# Altium PCB brushless_nosensor.PcbDoc
Units mil, origin at the board's own origin, x right, y up, seen from the top; angles counter-clockwise.
Board outline 1625.03 x 870.03 mil, 2 copper layers (Top Layer, Bottom Layer); 68 components, 60 nets, 252 pads, 75 vias.
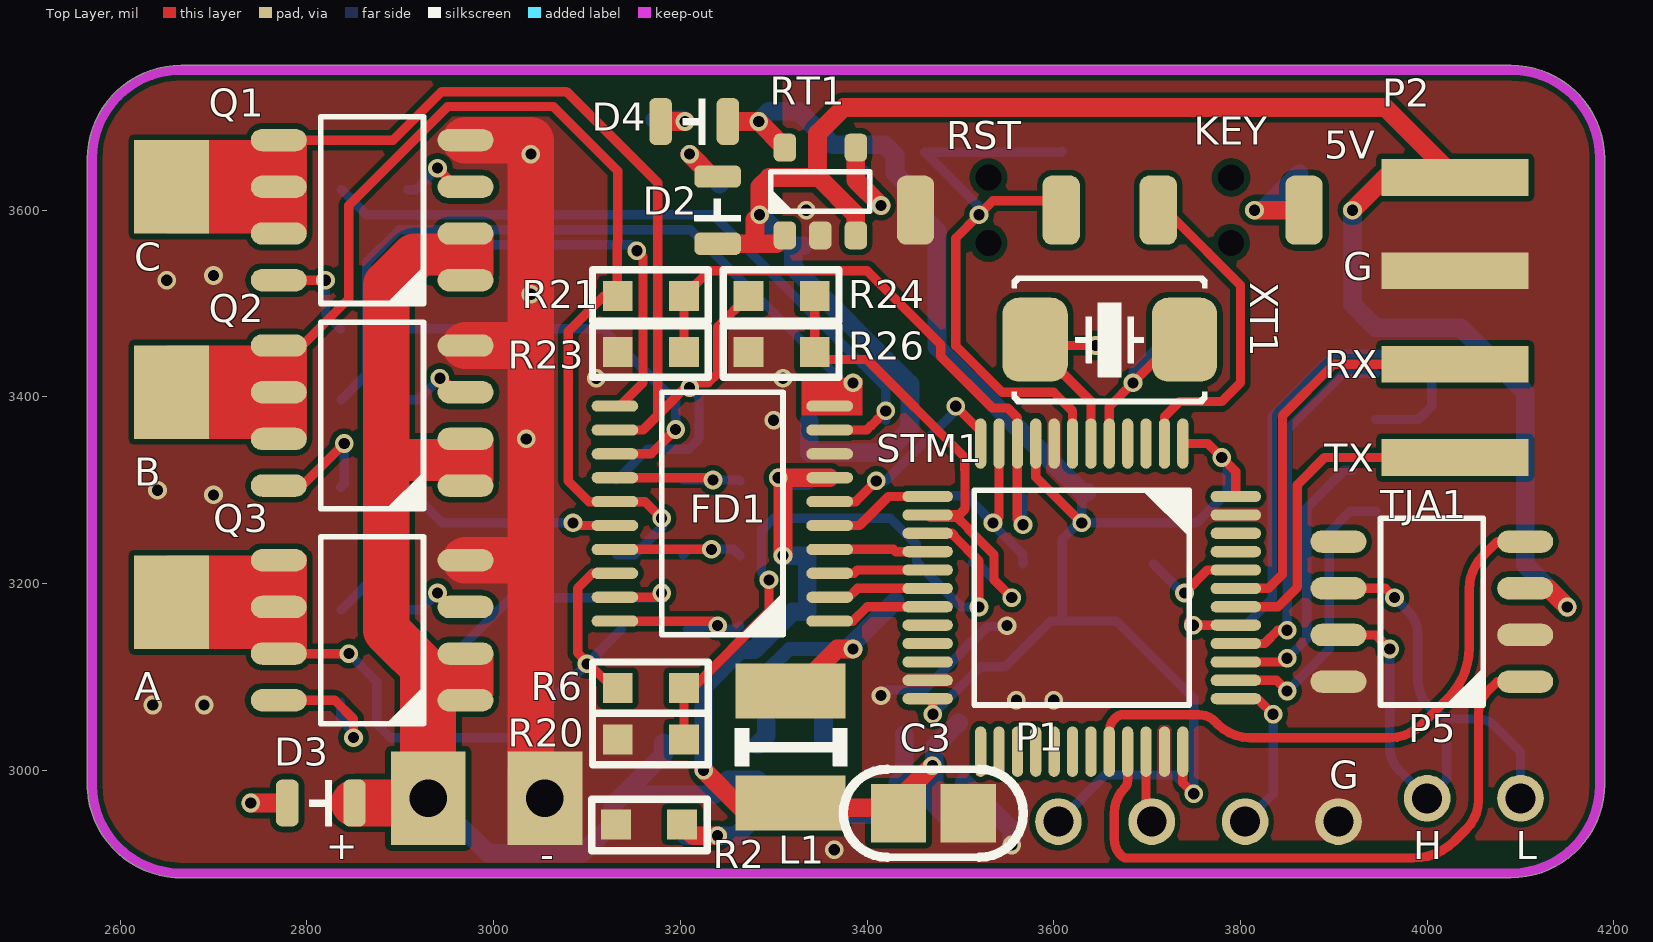
[diagram p0: Top Layer view]
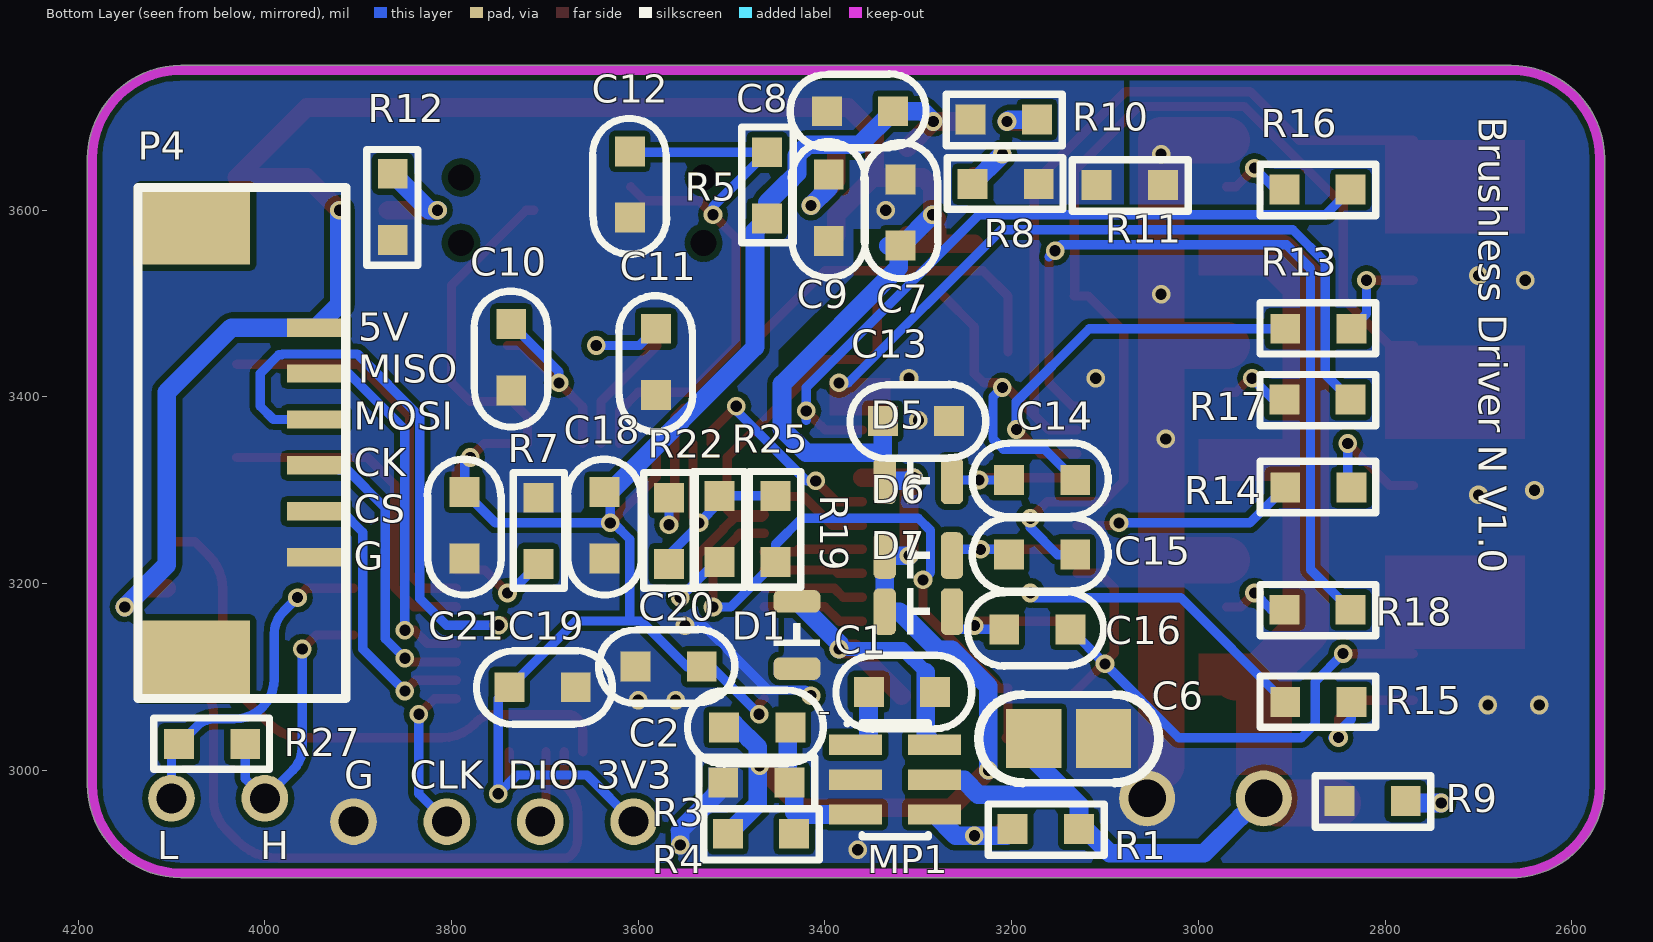
[diagram p1: Bottom Layer view, seen from below]
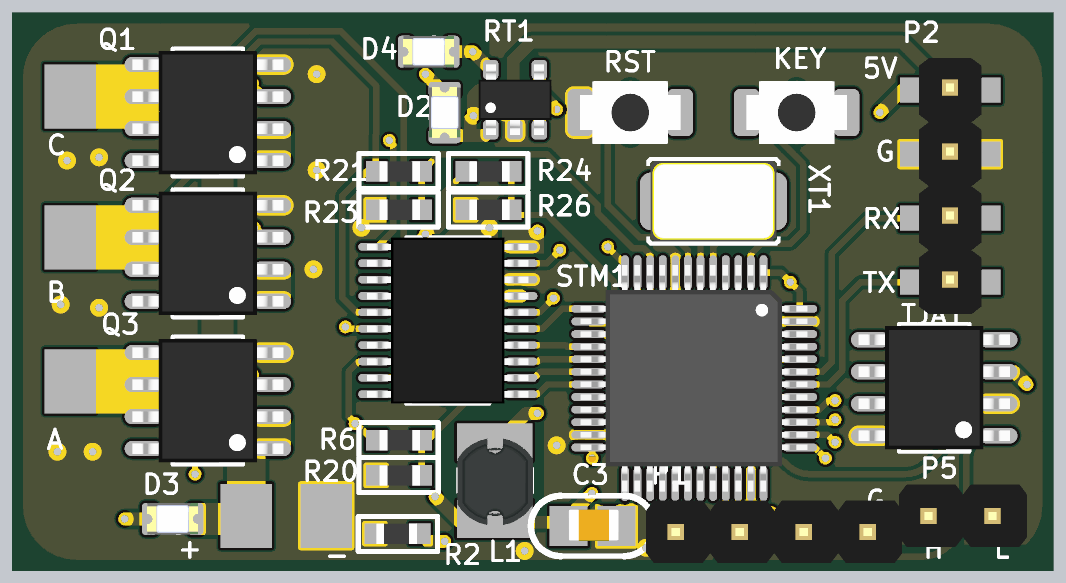
[diagram p2: 3D render of the assembled board from above, using the file's embedded part models]
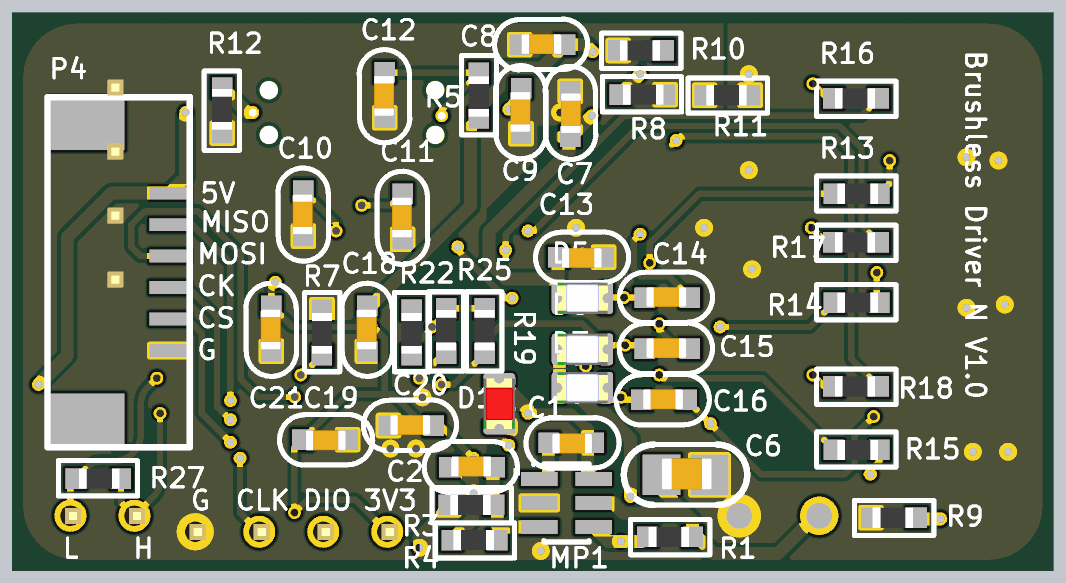
[diagram p3: 3D render of the assembled board from below, using the file's embedded part models]

## Layer stack, top to bottom
Top Solder: solder mask 0.4, Solder Resist, Dk 3.5
Top Layer: signal copper 1.4
Dielectric 1: dielectric 12.6, FR-4, Dk 4.8
Bottom Layer: signal copper 1.4
Bottom Solder: solder mask 0.4, Solder Resist, Dk 3.5

## Board outline
2658.58,2885.19 cw(c2665,2985) 2565.19,2978.58 cw(c2570,2980) 2564.99,2980 2564.99,3655 2564.98,3655 cw(c2665,3655) 2665,3755.01 4090,3755.01 4090,3755.02 cw(c4090,3655) 4190.02,3655 4190.02,2985 ccw(c4185,2985) 4190.02,2985.03 4190.02,2985 cw(c4090,2985) 4090,2884.99 2660,2884.99 cw(c2660,2890)

## Design rules (kind name [scope] priority, off if disabled: settings)
Clearance [All] p1: gap=6 ignorepadtopadclearanceinfootprint=FALSE
ComponentClearance [All] p1 off: gap=10 collisioncheckmode=3 verticalgap=10 showdistances=FALSE
PlaneConnect [All] p1: planeconnectstyle=Direct reliefexpansion=20 reliefentries=4 reliefconductorwidth=10 reliefairgap=10
PolygonConnect [All] p1: connectstyle=Direct reliefconductorwidth=10 reliefentries=4 polygonreliefangle="90 Angle" airgapwidth=10
RoutingVias [All] p1: holewidth=12 width=20 viastyle="Through Hole" minholewidth=12 minwidth=20 maxholewidth=28 maxwidth=50
SolderMaskExpansion [All] p1: expansion=4
Width [All] p1: maxlimit=100 minlimit=10 preferedwidth=10 minimp=50.000000 maximp=50.000000 favimp=50.000000
28 further rules are at their usual default settings.

## Components (designator, comment, footprint, x,y, rotation, side; value= is the part's Value field where it differs from the comment)
C1 "Cap_0603" CAP_0603 3315,3085 r0 bottom value=0.1u
C2 "Cap_0603" CAP_0603 3475,3045 r180 bottom value=33pF
C3 "Cap_0805" CAP_0805 3470,2955 r180 top value=10u
C6 "Cap_0805" CAP_0805 3140,3035 r0 bottom value=10u
C7 "Cap_0603" CAP_0603 3320,3600 r270 bottom value=1u
C8 "Cap_0603" CAP_0603 3365,3705 r180 bottom value=0.1u
C9 "Cap_0603" CAP_0603 3395,3600 r90 bottom value=22n
C10 "Cap_0603" CAP_0603 3735,3440 r90 bottom value=20pf
C11 "Cap_0603" CAP_0603 3580,3435 r90 bottom value=20pf
C12 "Cap_0603" CAP_0603 3608,3625 r90 bottom value=0.1u
C13 "Cap_0603" CAP_0603 3300,3375 r0 bottom value=0.1u
C14 "Cap_0603" CAP_0603 3170,3310 r180 bottom value=0.1u
C15 "Cap_0603" CAP_0603 3170,3230 r180 bottom value=0.1u
C16 "Cap_0603" CAP_0603 3175,3150 r180 bottom value=0.1u
C18 "Cap_0603" CAP_0603 3635,3260 r90 bottom value=0.1u
C19 "Cap_0603" CAP_0603 3700,3090 r0 bottom value=0.1u
C20 "Cap_0603" CAP_0603 3570,3110 r180 bottom value=0.1u
C21 "Cap_0603" CAP_0603 3785,3260 r90 bottom value=0.1u
D1 "Diode" LED_0805_RED 3430,3145 r90 bottom
D2 "D_0805" LED_0805_YELLOW 3240,3600 r90 top
D3 "D_0805" LED_0805_YELLOW 2815,2965 r180 top
D4 "D_0805" LED_0805_YELLOW 3215,3695 r180 top
D5 "D_0805" LED_0805_YELLOW 3300,3310 r180 bottom
D6 "D_0805" LED_0805_YELLOW 3300,3230 r180 bottom
D7 "D_0805" LED_0805_YELLOW 3300,3170 r180 bottom
FD1 "FD6288" TSSOP_E170_P0.65_20 3245,3275 r180 top
KEY "ButtonTACT_3x4x2_180" ButtonTACT_3x4x2_180H 3790,3600 r0 top
L1 "Ind_CD32" IND_CD52 3325,3025 r270 top value=10uH
MP1 "MP2451" SOT23-6 3325,2990 r270 bottom
P1 "HDR1x4_2.54" HDR1x4_2.54_180#1 3605,2945 r90 top
P2 "HDR1x4_2.54" HDR1x4_2.54_180#2 4030,3635 r0 top
P4 "HDR1x6_2.54" 1.25mm_1X6_SMT 3940,3325 r90 bottom
P5 "HDR1x2_2.54" HDR1X2_2.54_180 4000,2970 r90 top
Q1 "AO4932" SOP_E150_8 2870,3600 r180 top
Q2 "AO4932" SOP_E150_8 2870,3380 r180 top
Q3 "AO4932" SOP_E150_8 2870,3150 r180 top
R1 "Res_0603" RES_0603 3165,2855 r0 bottom value=20K
R2 "Res_0603" RES_0603 3165,2860 r180 top value=10K
R3 "Res_0603" RES_0603 3475,2905 r0 bottom value=23.7k
R4 "Res_0603" RES_0603 3470,2850 r0 bottom value=124K
R5 "Res_0603" RES_0603 3380,3625 r270 bottom value=10K
R6 "Res_0603" RES_0603 3170,3170 r0 top value=10K
R7 "Res_0603" RES_0603 3625,3255 r270 bottom value=10K
R8 "Res_0603" RES_0603 3205,3710 r180 bottom value=10K
R9 "Res_0603" RES_0603 2815,2885 r0 bottom value=10K
R10 "Res_0603" RES_0603 3210,3615 r0 bottom value=10K
R11 "Res_0603" RES_0603 3075,3545 r0 bottom value=0R
R12 "Res_0603" RES_0603 3945,3605 r90 bottom value=1K
R13 "Res_0603" RES_0603 2870,3555 r180 bottom value=10R
R14 "Res_0603" RES_0603 2870,3385 r180 bottom value=10R
R15 "Res_0603" RES_0603 2870,3155 r180 bottom value=10R
R16 "Res_0603" RES_0603 2874,3540 r0 bottom value=10R
R17 "Res_0603" RES_0603 2874,3315 r0 bottom value=10R
R18 "Res_0603" RES_0603 2874,3090 r0 bottom value=10R
R19 "Res_0603" RES_0603 3535,3260 r90 bottom value=10K
R20 "Res_0603" RES_0603 3170,3115 r0 top value=10K
R21 "Res_0603" RES_0603 3170,3590 r0 top value=10K
R22 "Res_0603" RES_0603 3485,3255 r270 bottom value=10K
R23 "Res_0603" RES_0603 3170,3530 r0 top value=10K
R24 "Res_0603" RES_0603 3310,3590 r0 top value=10K
R25 "Res_0603" RES_0603 3595,3260 r90 bottom value=10K
R26 "Res_0603" RES_0603 3310,3530 r0 top value=10K
R27 "Res_0603" RES_0603 4055,3110 r180 bottom value=120R
RST "ButtonTACT_3x4x2_180" ButtonTACT_3x4x2_180H 3530,3600 r180 top
RT1 "RT9193" SOT23-5 3350,3620 r90 top
STM1 "STM32F072C" LQFP_P0.5_48 3630,3185 r270 top
TJA1 "TJA1050" SOP_E150_8 4005,3170 r180 top
XT1 "XTAL_5032_2P" XT_5032_2 3660.07,3461.24 r0 top value=8M

## Footprints (in the part's own frame and the unit in brackets; to place one, negate y for a bottom-side part, rotate by r counter-clockwise, add the part's x,y. Pads: shape width x height; smd on the part's side, far side on the other; paste and mask are expansions set on the pad)
1.25mm_1X6_SMT [mm]
  rect 2.1x3 smd: 0(-5.225,3.425) 0(6.55,3.425)
  rect 0.5x1.6 smd: 1(-2.46,0.127) 2(-1.21,0.127) 3(0.04,0.127) 4(1.29,0.127) 5(2.54,0.127) 6(3.79,0.127)
  silkscreen extent -6.3,-0.67 7.6,4.97
ButtonTACT_3x4x2_180H [mil]
  round 0 hole 28: 0(0,-35) 0(0,35)
  rrect50% 40x74 smd: 1(-78,0) 2(78,0)
  body extent -79,-49 79,49, height 63
CAP_0603 [mil]
  rect 32x32 smd: 1(-33,1) 2(38,1)
  silkscreen extent -72,-38 73,41, body extent -30,-14 33,18, height 31
CAP_0805 [mm]
  rect 1.5x1.6 smd: 1(-0.977,0.025) 2(0.923,0.025)
  silkscreen extent -2.48,-1.17 2.42,1.23, body extent -1.08,-0.63 0.92,0.62, height 1
HDR1X2_2.54_180 [mil]
  round 50 hole 32: 1(0,0) 2(0,-100)
  body extent -49,-150 49,50, height 323
HDR1x4_2.54_180#1 [mil]
  round 50 hole 32: 1(0,0) 2(0,-100) 3(0,-200) 4(0,-300)
  body extent -49,-350 49,50, height 323
HDR1x4_2.54_180#2 [mil]
  rect 157.48x39.37 smd: 1(0,0) 2(0,-100) 3(0,-200) 4(0,-300)
  body extent -49,-350 49,50, height 323
IND_CD52 [mil]
  rect 59.06x118.11 smd: 1(-60,-7) 2(60,-7)
  silkscreen extent -20,-66 20,54, body extent -66,-65 70,53, height 83
LED_0805_RED [mil]
  rrect50% 24x50 smd: 1(-36,0) 2(36,0)
  silkscreen extent -12,-24 12,24, body extent -40,-25 40,25, height 43
LED_0805_YELLOW [mil]
  rrect50% 24x50 smd: 1(-36,0) 2(36,0)
  silkscreen extent -12,-24 12,24, body extent -40,-25 40,25, height 43
LQFP_P0.5_48 [mil]
  oval 54x12 smd: 1(-165,108.27) 2(-165,88.58) 3(-165,68.9) 4(-165,49.21) 5(-165,29.53) 6(-165,9.84) 7(-165,-9.84) 8(-165,-29.53) 9(-165,-49.21) 10(-165,-68.9) 11(-165,-88.58) 12(-165,-108.27) 25(165,-108.27) 26(165,-88.58) 27(165,-68.9) 28(165,-49.21) 29(165,-29.53) 30(165,-9.84) 31(165,9.84) 32(165,29.53) 33(165,49.21) 34(165,68.9) 35(165,88.58) 36(165,108.27)
  oval 12x54 smd: 13(-108.27,-165) 14(-88.58,-165) 15(-68.9,-165) 16(-49.21,-165) 17(-29.53,-165) 18(-9.84,-165) 19(9.84,-165) 20(29.53,-165) 21(49.21,-165) 22(68.9,-165) 23(88.58,-165) 24(108.27,-165) 37(108.27,165) 38(88.58,165) 39(68.9,165) 40(49.21,165) 41(29.53,165) 42(9.84,165) 43(-9.84,165) 44(-29.53,165) 45(-49.21,165) 46(-68.9,165) 47(-88.58,165) 48(-108.27,165)
  silkscreen extent -115,-115 115,115, body extent -177,-178 177,177, height 61
RES_0603 [mil]
  rect 32x32 smd: 1(-37,-82) 2(34,-82)
  silkscreen extent -64,-109 60,-54, body extent -31,-98 31,-66, height 18
SOP_E150_8 [mil]
  oval 60x24 smd: 1(-100,75) 2(-100,25) 3(-100,-25) 4(-100,-75) 5(100,-75) 6(100,-25) 7(100,25) 8(100,75)
  silkscreen extent -55,-100 55,100, body extent -118,-96 118,96, height 69
SOT23-5 [mil]
  rrect50% 30x24 smd: 1(-47,38) 2(-47,0) 3(-47,-38) 4(47,-38) 5(47,38)
  silkscreen extent -21,-53 21,53, body extent -55,-57 55,57, height 57
SOT23-6 [mm] "SOT-457/SC-74; 6 Leads; Body 3 x 3 mm, inc. leads (LxW max)"
  rect 0.55x1.45 smd: 1(-0.95,-1.075) 2(0,-1.075) 3(0.95,-1.075) 4(0.95,1.075) 5(0,1.075) 6(-0.95,1.075)
  silkscreen extent -1.57,-1.35 1.55,0.9
TSSOP_E170_P0.65_20 [mil]
  oval 50x12 smd: 1(-115,115.16) 2(-115,89.57) 3(-115,63.98) 4(-115,38.39) 5(-115,12.8) 6(-115,-12.8) 7(-115,-38.39) 8(-115,-63.98) 9(-115,-89.57) 10(-115,-115.16) 11(115,-115.16) 12(115,-89.57) 13(115,-63.98) 14(115,-38.39) 15(115,-12.8) 16(115,12.8) 17(115,38.39) 18(115,63.98) 19(115,89.57) 20(115,115.16)
  silkscreen extent -65,-130 65,130, body extent -126,-130 126,130, height 42
XT_5032_2 [mil]
  rrect50% 70x90 smd: 1(-80,0) 2(80,0)
  silkscreen extent -104,-68 104,68, body extent -98,-63 98,63, height 39

## Part data
C1 C2 C3 C6 C7 C8 C9 C10 C11 C12 C13 C14 C15 C16 C18 C19 C20 C21: "Capacitor"
KEY RST: "Button"
L1: "Inductor"
P1 P2 P5: "Header"
P4: library part HDR1x6_2.54T, "Header"
R1 R2 R3 R4 R5 R6 R7 R8 R9 R10 R11 R12 R13 R14 R15 R16 R17 R18 R19 R20 R21 R22 R23 R24 R25 R26 R27: "Resistor"
RT1: "Power"
STM1: library part STM32F103C, "MCU"
XT1: "Crystal Oscillator"

## Free pads (board coordinates)
  rect 80x100 smd: 2(2655,3180) 2(2655,3405) 2(2655,3625) 2(2930,2970) 2(3055,2970)
  round 60 hole 40: 3(2930,2970) 3(3055,2970)

## Via types
v1: diameter 20, hole 12, Top Layer to Bottom Layer, 75 vias

## Nets (pads, with @x,y where several pads share a name; then routed paths per layer and width w, separated by ;. In a path a pad name is that pad's centre, name@x,y a point inside that pad or via, vN(x,y) a via of type N, cw(c..) or ccw(c..) an arc to the next point about the centre after c; other vN are vias at no path point)
3V3: C8.2 C18.2 C19.2 C20.2 C21.2 D4.1 P1.1 R5.2 RT1.5 STM1.1 STM1.9 STM1.24 STM1.36 STM1.48 | length 1954.6
  Top Layer w10: STM1.24 3470.56,3071.18 v1(3470.56,3060) ; STM1.9 3580.79,3314.21 v1(3630,3265) ; STM1.36 3738.27,2986.73 v1(3750,2975) ; STM1.1 3765,3350 v1(3780,3335) 3795,3320 STM1.48
  Top Layer w20: D4.1 v1(3284,3695) RT1.5
  Bottom Layer w10: v1(3470.56,3060) 3521.56,3111 C20.2 3547.86,3111 3596.86,3160 3610,3160 ; P1.1 3655,2995 3730,2995 v1(3750,2975) 3750,3077 C19.2 3667,3160 3610,3160 ; C18.2 3630,3292 v1(3630,3265) ; v1(3780,3335) 3786,3329 C21.2 3753,3265 v1(3630,3265) ; 3610,3160 3609,3161 3609,3247.56 3626.44,3265 v1(3630,3265)
  Bottom Layer w20: v1(3284,3695) 3295,3706 C8.2 3363,3670 3418.63,3670 3430,3658.63 3430,3639.37 3439.37,3630 3440,3630 3462,3608 R5.2 3475,3578 3475,3453.37 3630.37,3298 C18.2
5V: C2.1 C3.2 C7.2 C13.2 D2.1 D5.1 D6.1 D7.1 FD1.7 L1.2 P2.1 P4.6 R4.2 RT1.1 RT1.3 TJA1.3 | length 3189.1
  Top Layer w20: v1(3225,3000) 3265,2960 3427.67,2960 3427.67,2962.67 v1(3470,3005) ; D2.1 3280,3564 ; v1(3310,3230) 3310,3308.39 v1(3305,3313.39) FD1.7 ; RT1.1 3303,3564 3280,3564 ; RT1.3 3388,3595.23 3348.23,3635 3347.06,3635 ; v1(3920,3600) 3955,3635 P2.1 3955,3710 3375,3710 3347.06,3682.06 3347.06,3635 ; TJA1.3 4130,3195 v1(4150,3175) ; 3280,3564 3280,3590 v1(3285,3595) 3285,3625 3295,3635 3347.06,3635
  Bottom Layer w20: v1(3225,3000) 3225,3090 3264,3129 3279.11,3129 3320.11,3170 D7.1 D6.1 v1(3310,3230) ; v1(3285,3595) 3318,3562 C7.2 C7.2@3321,3562 ; v1@3306.39,3313.39 v1(3305,3313.39) 3308.39,3310 D5.1 ; C7.2@3332,3562 C7.2@3321,3562 ; C13.2 3338,3340 3420,3340 3446,3366 3446,3413.7 3321,3538.7 C7.2@3321,3562 ; C2.1@3498,3051 3498,3050.67 3481.33,3034 3481,3034 3472,3025 3472,2964 R4.2 ; v1(3920,3600) 3920,3499.21 P4.6 4035.79,3474.21 4105,3405 4105,3220 v1(4150,3175)
A: C16.2 FD1.18 pad.2@2655,3180 Q3.5 Q3.6 Q3.7 R6.1 | length 655.1
  Top Layer w10: Q3.7 v1(2845,3125) ; FD1.18 3106.02,3211.02 3090,3195 3090,3126 R6.1@3133,3083
  Bottom Layer w10: v1(2845,3125) 2875,3095 2875,3050 2890,3035 3021,3035 v1(3100,3114) C16.2
AH: FD1.19 R15.1 | length 373.4
  Top Layer w10: FD1.19 3175.43,3185.43 v1(3180,3190)
  Bottom Layer w10: R15.1 3019,3185 3175,3185 v1(3180,3190)
AL: FD1.11 R18.1 | length 863.7
  Top Layer w10: FD1.11 3135.16,3390.16 3160,3415 3160,3550 v1(3153.5,3556.5)
  Bottom Layer w10: R18.1 2880,3215 2880,3537.37 2905.63,3563 3147,3563 v1(3153.5,3556.5) v1@3160,3550
B: C15.2 FD1.15 pad.2@2655,3405 Q2.5 Q2.6 Q2.7 R21.1 | length 1105.9
  Top Layer w10: Q2.5 2795,3455 2845,3505 2845,3605 2951,3711 3064,3711 3133,3642 3133,3565.7 3132.5,3565.2 3132.5,3508.5 R21.1 3118,3508 3080,3470 3080,3310 3102.2,3287.8 FD1.15 3162.2,3287.8 v1(3180,3270)
  Bottom Layer w10: C15.2 3151,3231 3180,3260 v1(3180,3270)
BH: FD1.16 R14.1 | length 239.9
  Top Layer w10: v1(3085,3265) 3087.8,3262.2 FD1.16
  Bottom Layer w10: R14.1 2945,3265 v1(3085,3265)
BL: FD1.10 R17.1 | length 797.1
  Top Layer w10: FD1.10 3360.16,3390.16 v1(3385,3415) v1@3384.84,3415
  Bottom Layer w10: R17.1 2864,3424 2864,3544 2899,3579 3211,3579 3375,3415 v1(3385,3415)
C: C14.2 FD1.12 pad.2@2655,3625 Q1.5 Q1.6 Q1.7 R24.1 | length 1115
  Top Layer w10: Q1.5 2892.37,3675 2944.37,3727 3078,3727 3176,3629 3176,3380.57 3175,3379.57 ; FD1.12 3160,3364.57 3175,3379.57 ; R24.1 3240,3475 3240,3425 3230,3415 3210.43,3415 3175,3379.57
  Bottom Layer w10: C14.2 3165,3344 3209,3344 3220,3355 3220,3400 v1(3210,3410)
CAN_H: P5.1 R27.2 TJA1.7 | length 303
  Top Layer w10: TJA1.7 3945,3145 v1(3960,3130)
  Bottom Layer w10: v1(3960,3130) 3960,3024.14 ccw(c3994.14,3024.14) 3969.98,3000.02 P5.1 4021,2991 R27.2
CAN_L: P5.2 R27.1 TJA1.6 | length 358.1
  Top Layer w10: TJA1.6 3955,3195 v1(3965,3185)
  Bottom Layer w10: v1(3965,3185) 3980,3170 cw(c3955.86,3145.86) 3990,3145.86 3990,3097.68 ccw(c4032.68,3097.68) 4002.5,3067.5 ccw(c4032.68,3097.68) 4032.68,3055 4054.39,3055 cw(c4054.39,3029.39) 4072.5,3047.5 R27.1 4100,3020 P5.2
CAN_RX: STM1.32 TJA1.4 | length 631.7
  Top Layer w10: STM1.32 3659.53,3041.79 cw(c3678.21,3041.79) 3665,3055 3666.58,3056.58 cw(c3673.7,3049.46) 3673.7,3059.53 3755.47,3059.53 cw(c3755.47,3035.39) 3772.54,3052.46 3775.86,3049.14 ccw(c3810,3083.28) 3810,3035 3960,3035 ccw(c3960,3083.28) 3994.12,3049.12 ; 3994.14,3049.14 4000,3055 4022.5,3077.5 ccw(c3968.18,3131.82) 4045,3131.82 4045,3193.79 cw(c4096.21,3193.79) 4059.99,3229.99 4075,3245 TJA1.4
CAN_TX: STM1.33 TJA1.1 | length 695.9
  Top Layer w10: STM1.33 3679.21,2989.21 cw(c3667.14,2989.21) 3675.68,2980.68 3675.61,2980.61 ccw(c3701.21,2955) 3665,2955 3665,2926 ccw(c3689.14,2926) 3672.07,2908.93 ccw(c3679.14,2916) 3679.14,2906 3985,2906 ccw(c3985,2968.77) 4029.36,2924.36 ; 4029.38,2924.38 4042.19,2937.19 ccw(c4011.27,2968.11) 4055,2968.11 4055,3060.86 cw(c4089.14,3060.86) 4064.98,3084.98 4075,3095 TJA1.1
CH: FD1.13 R13.1 | length 426.1
  Top Layer w10: FD1.13 3168.98,3338.98 v1(3195,3365)
  Bottom Layer w10: R13.1 3117,3473 3195,3395 v1(3195,3365)
CH1_L: FD1.4 STM1.16 | length 106
  Top Layer w10: FD1.4 3428.39,3236.61 3430.79,3234.21 STM1.16
CH2: FD1.3 STM1.17 | length 106.5
  Top Layer w10: FD1.3 3386.02,3211.02 3389.53,3214.53 STM1.17
CH2_L: FD1.5 STM1.13 | length 117.9
  Top Layer w10: FD1.5 3391.9,3262.2 3422.97,3293.27 STM1.13
CH3: FD1.2 STM1.18 | length 108.9
  Top Layer w10: FD1.2 3380.43,3185.43 3389.84,3194.84 STM1.18
CH3_L: FD1.6 STM1.12 | length 231.2
  Top Layer w10: FD1.6 3387.8,3287.8 v1(3410,3310) ; v1(3495,3390) 3521.73,3363.27 STM1.12
  Bottom Layer w10: v1(3410,3310) 3419.7,3310 3495,3385.3 v1(3495,3390)
CH4: FD1.1 STM1.19 | length 111.3
  Top Layer w10: FD1.1 3384.84,3159.84 3400.16,3175.16 STM1.19
CL: FD1.9 R16.1 | length 774.6
  Top Layer w10: FD1.9 3399.57,3364.57 3404,3369 3404.56,3369 3411,3375.44 3411,3376 v1(3420,3385)
  Bottom Layer w10: R16.1 2864,3595 3235,3595 3420,3410 v1(3420,3385) 3420,3375
CSN: P4.2 STM1.38 | length 307.6
  Top Layer w10: STM1.38 3838.58,3096.42 v1(3850,3085)
  Bottom Layer w10: v1(3850,3085) 3895,3130 3895,3255 3917.36,3277.36 P4.2
GND: C7.1 C8.1 C9.1 C10.1 C11.1 C12.1 C18.1 C19.1 C20.1 C21.1 P1.4 P2.2 P4.1 R7.1 R8.2 R10.2 R11.2 R12.1 RST.2 RT1.2 STM1.8 STM1.23 STM1.35 STM1.47 TJA1.2 TJA1.8 | length 167
  Bottom Layer w10: v1(3415,3080) 3421,3086 3461.04,3086 3505,3129.96 3505,3131.56 3511.44,3138 3513.04,3138 3529.04,3154 3549,3154 v1(3550,3155)
  other v1: 3560,3075 3600,3075 3335,3600
INA: R6.2 R19.1 R20.2 STM1.15 | length 674
  Top Layer w10: R6.2@3204,3083 R20.2 R20.2@3206,3035 ; R6.2 3213,3088 3295,3170 v1(3295,3204) ; STM1.15 3491.1,3253.9 3493,3252 3493,3251.21 ; 3493.04,3251.21 3520,3224.25 v1(3520,3175)
  Bottom Layer w10: v1(3295,3204) 3287,3212 3287,3257 3300,3270 3425,3270 3453,3242 R19.1 3501,3175 v1(3520,3175)
INB: R21.2 R22.1 R23.2 STM1.10 | length 646.9
  Top Layer w10: R23.2 R21.2 3231,3535 3400,3535 3479,3456 3479,3443.38 3534.38,3388 3550.72,3388 3561.1,3377.62 STM1.10 3561.1,3268.9 v1(3567,3263)
  Bottom Layer w10: v1(3567,3263) R22.1
INC: R24.2 R25.1 R26.2 STM1.14 | length 566.1
  Top Layer w10: R24.2 R26.2 3352,3440 3400,3440 3504.73,3335.27 3504.73,3321.96 3505,3321.69 3505,3280 3498.58,3273.58 STM1.14 3467.68,3270.9 3496.73,3270.9 3509,3258.63 3509,3257.88 3536,3230.88 3536,3204 v1(3555,3185)
  Bottom Layer w10: R25.1 3517,3223 v1(3555,3185)
INP: R19.2 R22.2 R25.2 STM1.11 | length 243
  Top Layer w10: v1(3535,3265) 3541.42,3271.42 STM1.11
  Bottom Layer w10: R19.2 R25.2 3513,3287 v1(3535,3265) 3535,3263 3567,3231 R22.2
KEY: KEY.1 STM1.2 | length 351.2
  Top Layer w10: KEY.1 3720,3600 3765,3555 3765,3554.64 3800,3519.64 3800,3415 3780,3395 3735,3395 3718.58,3378.58 STM1.2
MISO: P4.5 STM1.40 | length 395.7
  Top Layer w10: STM1.40 3825.79,3135.79 3840,3150 v1(3850,3150)
  Bottom Layer w10: v1(3850,3150) 3850,3365 3910,3425 P4.5
MOSI: P4.4 STM1.41 | length 651.4
  Top Layer w10: v1@3745,3160 v1(3749.53,3155.47) STM1.41
  Bottom Layer w10: v1(3749.53,3155.47) 3805.47,3155.47 3834,3184 3834,3379 3900.84,3445.84 3981.05,3445.84 3981.89,3445 3985,3445 4005,3425 4005,3390 3990.79,3375.79 P4.4
NetC1_1: C1.1 D1.2 L1.1 MP1.6 | length 356.4
  Top Layer w20: L1.1@3318,3080 3368,3130 v1(3385,3130)
  Bottom Layer w15: C1.1 C1.1@3292,3094 ; 3292,3105.12 3316.88,3130 v1(3385,3130)
  Bottom Layer w20: MP1.6 3292,3036.72 3292,3105.12 ; v1(3385,3130) 3385,3136 D1.2
NetC1_2: C1.2 MP1.1 | length 49.3
  Bottom Layer w20: MP1.1@3353.33,3033.91 C1.2@3353.33,3083.18
NetC2_2: C2.2 MP1.3 R3.1 R4.1 | length 152.6
  Bottom Layer w20: MP1.3 3430.6,2952.6 3433,2955 3433,2987 3440,2994 C2.2@3440,3038
NetC9_2: C9.2 RT1.4 | length 114.1
  Top Layer w20: RT1.4 3388,3632 v1(3415,3605)
  Bottom Layer w20: C9.2 3396,3624 v1(3415,3605)
NetC10_2: C10.2 STM1.5 XT1.2 | length 231.2
  Top Layer w10: STM1.5 3659.53,3389.53 v1(3685,3415) 3725,3455 XT1.2@3740,3455
  Bottom Layer w10: v1(3685,3415) 3685,3427 C10.2
NetC11_2: C11.2 STM1.6 XT1.1 | length 266.2
  Top Layer w10: STM1.6 3639.84,3395.16 3580,3455 v1(3645,3455)
  Bottom Layer w10: C11.2 3599,3455 v1(3645,3455)
NetC14_1: C14.1 D5.2 FD1.14 | length 164
  Top Layer w10: FD1.14 v1@3232.61,3313.39
  Bottom Layer w10: C14.1 v1(3235,3311) 3263,3311 D5.2
NetC15_1: C15.1 D6.2 FD1.17 | length 169.5
  Top Layer w10: FD1.17 v1(3233.39,3236.61)
  Bottom Layer w10: C15.1 3208.61,3236.61 v1(3233.39,3236.61) 3257.39,3236.61 D6.2
NetC16_1: C16.1 D7.2 FD1.20 | length 169.7
  Top Layer w10: FD1.20 3235.16,3159.84 v1(3240,3155)
  Bottom Layer w10: C16.1 3260,3151 D7.2@3264,3155
NetD2_2: D2.2 R8.1 | length 85.2
  Top Layer w20: v1(3210,3660) 3234,3636 D2.2
  Bottom Layer w20: v1(3210,3660) R8.1
NetD3_2: D3.2 R9.1 | length 77.8
  Top Layer w20: v1(2740,2965) D3.2
  Bottom Layer w20: v1(2740,2965) 2776,2965 R9.1
NetD4_2: D4.2 R10.1 | length 58.8
  Top Layer w20: D4.2 v1(3205,3695)
  Bottom Layer w20: R10.1 3203,3697 v1(3205,3695)
NetKEY_2: KEY.2 R12.2 | length 117.2
  Top Layer w20: v1(3815,3600) KEY.2
  Bottom Layer w20: v1(3815,3600) 3824,3600 R12.2
NetMP1_4: MP1.4 R1.2 R2.1 | length 129
  Top Layer w20: R2.1 3214,2930 v1(3240,2930)
  Bottom Layer w20: R1.2@3206,2930 v1(3240,2930) 3260.08,2930 MP1.4
NetQ1_3: Q1.3 R16.2 | length 79.8
  Top Layer w10: v1(2940,3645) 2960,3625 Q1.3
  Bottom Layer w10: R16.2 2917,3622 v1(2940,3645)
NetQ1_8: Q1.8 R13.2 | length 108.6
  Top Layer w10: Q1.8 v1(2820,3525)
  Bottom Layer w10: v1(2820,3525) 2820,3489 R13.2
NetQ2_3: Q2.3 R17.2 | length 77.7
  Top Layer w10: v1(2942.5,3420) 2945,3420 2960,3405 Q2.3
  Bottom Layer w10: R17.2 2919.5,3397 v1(2942.5,3420)
NetQ2_8: Q2.8 R14.2 | length 137.3
  Top Layer w10: Q2.8 2795,3305 v1(2840,3350)
  Bottom Layer w10: R14.2 2840,3307 v1(2840,3350)
NetQ3_3: Q3.3 R18.2 | length 75.7
  Top Layer w10: v1(2940,3190) 2955,3175 Q3.3
  Bottom Layer w10: R18.2 2922,3172 v1(2940,3190)
NetQ3_8: Q3.8 R15.2 | length 160.6
  Top Layer w10: Q3.8 2830,3075 2850,3055 v1(2850,3035)
  Bottom Layer w10: R15.2 2836,3055 2856,3035 v1(2850,3035)
NetR7_2: R7.2 STM1.44 | length 111
  Top Layer w10: v1(3740,3190) 3764.53,3214.53 STM1.44
  Bottom Layer w10: R7.2 3738,3190 v1(3740,3190)
PGND: C3.1 C6.1 C13.1 D1.1 FD1.8 MP1.2 pad.2@3055,2970 pad.3@3055,2970 Q1.4 Q2.4 Q3.4 R2.2 R3.2 R9.2 R11.1 R20.1 R23.1 R26.1 | length 974.3
  Top Layer w50: Q3.4 3025,3225 3040,3240 ; Q2.4 3040,3455 ; Q1.4 3040,3675 3040,3455 ; pad.2@3040,3005 3040,3240 ; 3040,3240 3040,3455
  Bottom Layer w20: R3.2@3504,2987 3555,2936 v1(3555,2920)
  other v1: 3365,2915 2635,3070 2690,3070 2700,3295 2640,3300 3035,3355 3300,3375 3110,3420 3310,3420 3040,3510 2650,3525 2700,3530 3040,3660
PWM_IN: STM1.22
RST: C12.2 R5.1 RST.1 STM1.7 | length 678.5
  Top Layer w10: RST.1@3608,3625 3593,3610 3535,3610 v1(3520,3595) 3495,3570 3495,3454.7 3544.7,3405 3600,3405 3620.16,3384.84 STM1.7
  Bottom Layer w10: v1(3520,3595) 3520,3604 R5.1 3608,3662 C12.2
RXD: P2.3 STM1.43 | length 434.1
  Top Layer w10: STM1.43 3829.84,3194.84 3845,3210 3845,3380 3900,3435 P2.3
SCK: P4.3 STM1.39 | length 292.1
  Top Layer w10: STM1.39 3846.1,3116.1 v1(3850,3120)
  Bottom Layer w10: v1(3850,3120) 3871,3141 3871,3281 3911.57,3321.57 P4.3@3920,3321.57
SWCLK: P1.3 STM1.37 | length 174.4
  Top Layer w10: STM1.37 3818.27,3076.73 v1(3835,3060)
  Bottom Layer w10: P1.3 3835,2975 v1(3835,3060)
SWDIO: P1.2 STM1.34 | length 77.5
  Top Layer w10: STM1.34 3698.9,2951.1 P1.2
TXD: P2.4 STM1.42 | length 365.6
  Top Layer w10: STM1.42 3840.16,3175.16 3861,3196 3861,3306 3890,3335 P2.4
VIN: C6.2 D3.1 MP1.5 pad.2@2930,2970 pad.3@2930,2970 Q1.1 Q1.2 Q2.1 Q2.2 Q3.1 Q3.2 R1.1 | length 1049.6
  Top Layer w50: D3.1 2915,2965 pad.2@2930,2970 ; 2915,3550 2885,3520 2885,3150 2935,3100 2960,3100
  Bottom Layer w20: 2955,2950 2994,2911 3095,2911 3128,2944 3128,2963 3139,2974 ; C6.2@3182,3029.67 3182,3017 3139,2974 ; MP1.5 3251,2990 3251,2989.23 3235.77,2974 3139,2974
pads on no net: KEY.0 P4.0 RST.0 STM1.3 STM1.4 STM1.20 STM1.21 STM1.25 STM1.26 STM1.27 STM1.28 STM1.29 STM1.30 STM1.31 STM1.45 STM1.46 TJA1.5

## Polygon pours and split planes (outlines as drawn)
PGND on Top Layer "Top Layer-No Net" (solid, remove dead copper, pour order 18): 2325,3905 2330,3910 4510,3910 4510,2915 4345,2750 4320,2775 2370,2775
GND on Top Layer "Top Layer-No Net" (solid, remove dead copper, pour order 10): 3300,3810 3310,3800 3310,3540 3385,3540 3400,3525 3395,3520 3395,2925 4305,2925 4305,3825
PGND on Bottom Layer "Top Layer-No Net" (solid, remove dead copper, pour order 20): 2530,3825 4280,3825 4345,3760 4275,3690 4275,2825 2545,2825 2500,2780
GND on Bottom Layer "Top Layer-No Net" (solid, remove dead copper, pour order 12): 3080,3800 3080,3605 3105,3580 3370,3580 3370,3530 3450,3450 3450,2884.99 4395,2884.99 4395,3940

## Keep-outs
Keep-Out Layer:
  lines w10: 2570,2980 2570,3655 cw(c2665,3655) 2665,3750 4090,3750 cw(c4090,3655) 4185,3655 4185,2985 cw(c4090,2985) 4090,2890 2660,2890 ; 2570,2985 ccw(c2665,2985) 2665,2890

## Other copper
Top Layer:
  rectangle net BL: 3330,3380 3395,3420
  rectangle net VIN: 2915,3530 3000,3575
  rectangle net VIN: 2890,3310 3000,3355
  rectangle net C: 2650,3575 2800,3675
  rectangle net B: 2650,3355 2800,3455
  rectangle net A: 2650,3130 2800,3230
  rectangle net VIN: 2930,3080 3000,3125
  rectangle net VIN: 2900,2995 2960,3115

## Silkscreen, mask and mechanical layers (free items; w line width, h text height)
Top Overlay:
  text "5V" at 3890,3655 h30
  text "C" at 2615,3535 h30
  text "G" at 3910,3525 h30
  text "RX" at 3890,3420 h30
  text "TX" at 3890,3320 h30
  text "B" at 2615,3305 h30
  text "A" at 2615,3075 h30
  text "G" at 3895,2980 h30
  text "+" at 2820,2905 h30
  text "H" at 3985,2905 h30
  text "L" at 4095,2905 h30
  text "-" at 3050,2895 h30
Bottom Overlay:
  text "Brushless Driver N V1.0" at 2700,3700 h30 r90
  text "5V" at 3900,3460 h30
  text "MISO" at 3900,3415 h30
  text "MOSI" at 3905,3365 h30
  text "CK" at 3905,3315 h30
  text "CS" at 3905,3265 h30
  text "G" at 3905,3215 h30
  text "·" at 3385,3010 h120
  text "3V3" at 3645,2980 h30
  text "DIO" at 3740,2980 h30
  text "CLK" at 3845,2980 h30
  text "G" at 3915,2980 h30
  text "H" at 4005,2905 h30
  text "L" at 4115,2905 h30
Top Solder:
  rectangle: 2665,3575 2800,3675
  rectangle: 2665,3355 2800,3455
  rectangle: 2665,3130 2800,3230

## Dimensions
4185,3655 to 2570,2980 on Mechanical 1
4090,3750 to 4090,2890 on Mechanical 1